# Altium PCB AC_board.PcbDoc (part 3 of 4)
Units mil, origin at the board's own origin, x right, y up, seen from the top; angles counter-clockwise.
Board outline 6299.21 x 4130.86 mil, 4 copper layers (Top Layer, Layer 1, Layer 2, Bottom Layer), stack 31.891 mil thick; 48 components, 40 nets, 187 pads, 6431 vias.
Unrouted connection lines stored in the file: 10.
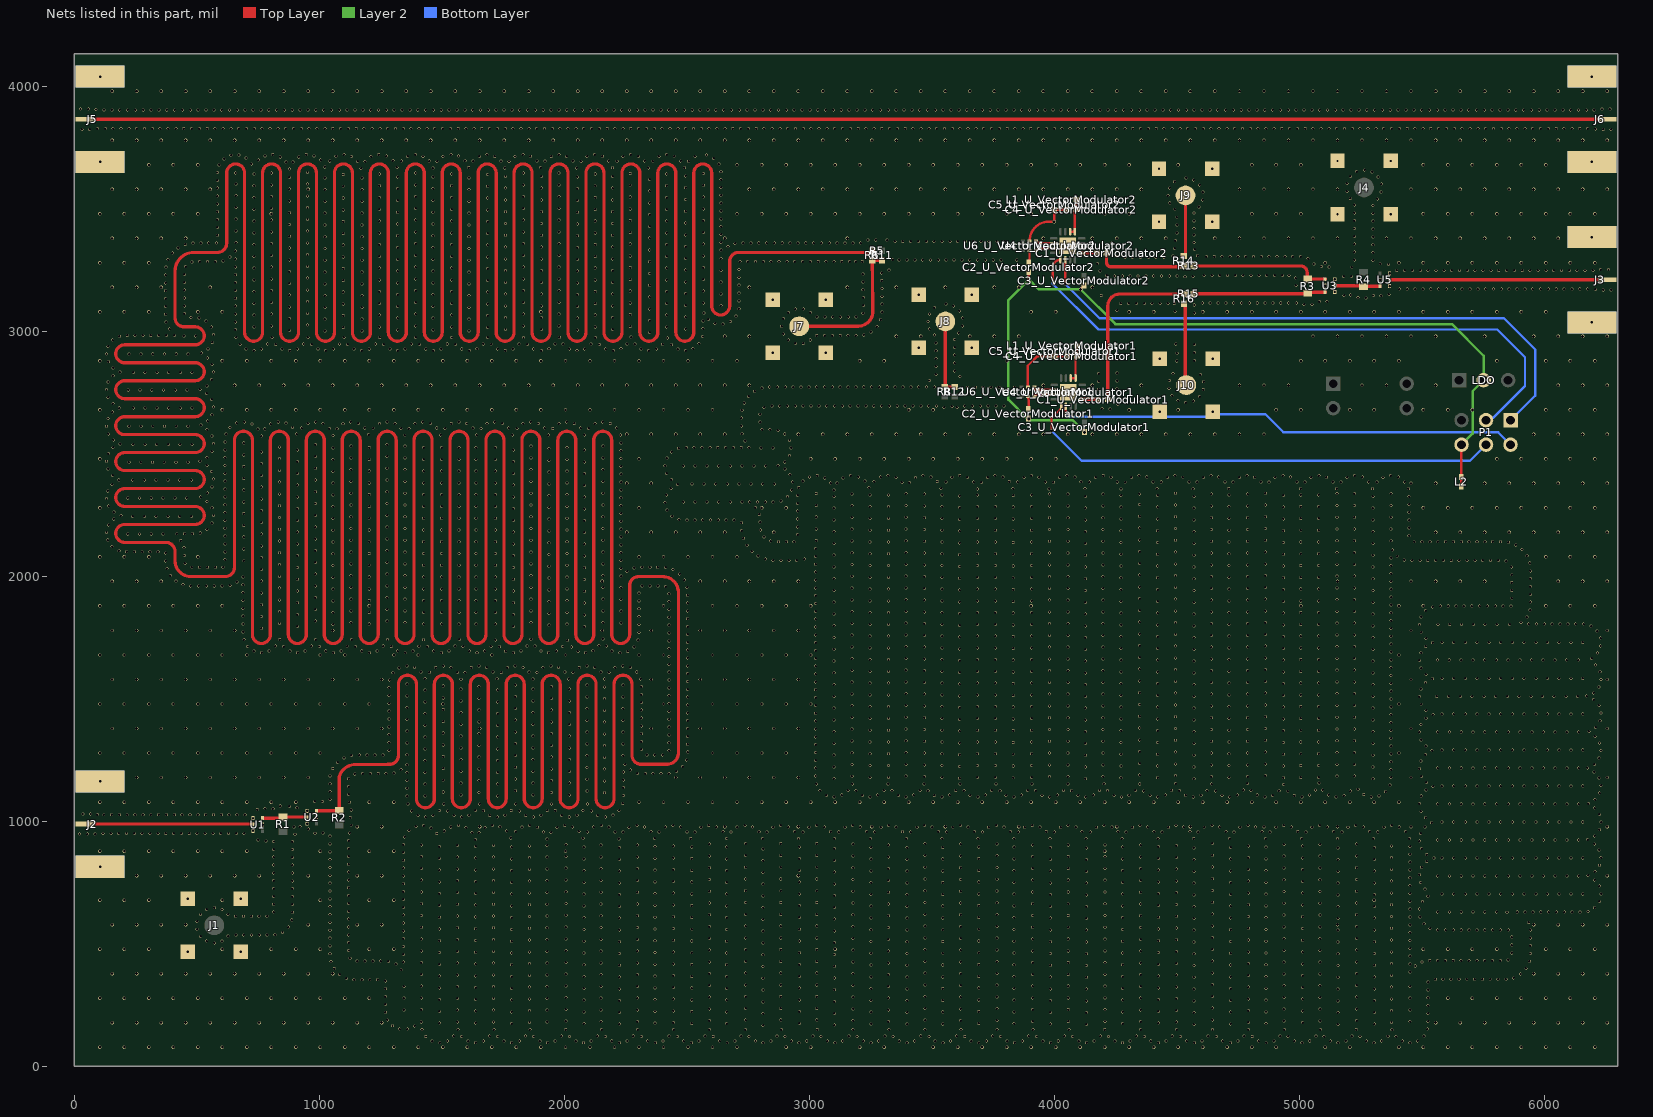
[diagram p5: the nets of this part, all layers, seen from the top]

## Via types
v1: diameter 12/12/12/12 (per signal layer), hole 10, Top Layer to Bottom Layer, 5510 vias
v2: diameter 14/14/14/14 (per signal layer), hole 12, Top Layer to Bottom Layer, 919 vias
v3: diameter 15/15/15/15 (per signal layer), hole 12, Top Layer to Bottom Layer, 2 vias

## Nets (pads, with @x,y where several pads share a name; then routed paths per layer and width w, separated by ;. In a path a pad name is that pad's centre, name@x,y a point inside that pad or via, vN(x,y) a via of type N, cw(c..) or ccw(c..) an arc to the next point about the centre after c; other vN are vias at no path point) (continued)
AGND: (continued)
  other v1: 3556.81,2386.94 3963.23,2386.91 4256.27,2387.15 4549.4,2387.26 4695.87,2387.44 4842.58,2387.32 4989.12,2387.4 5135.78,2387.35 5282.35,2387.39 5428.99,2387.36 3264.42,2388.02 3815.75,2388.04 4109.24,2387.69 4402.59,2387.52 1130.31,2389 1350.31,2389 1864.31,2389 2158.31,2389 3521.86,2388.73 616.25,2390.02 2973.76,2390.6 3226.72,2390.65 182.27,2394.06 239,2395.31 287,2395.31 335,2395.31 383,2395.31 431,2395.31 479,2395.31 984.31,2395 1277.31,2395 2436.94,2396.12 569.01,2398.49 692.26,2401.57 3062.96,2403.64 3137.51,2403.6 3352.95,2405.33 3433.12,2404.96 3727.21,2405.32 4020.83,2405.49 3582.45,2406.09 3644.94,2405.84 3875.11,2405.85 3937.6,2406.07 4083.32,2406.44 4168.05,2405.74 4230.54,2406.19 4314.24,2405.57 4376.73,2406.36 4461.14,2405.69 4523.63,2406.24 4607.55,2405.6 4670.04,2406.33 4754.3,2405.66 4816.79,2406.27 4900.81,2405.62 4963.3,2406.31 5047.49,2405.65 5109.98,2406.28 5194.05,2405.63 5256.54,2406.3 5340.7,2405.64 5403.19,2406.29 3290.47,2406.6 3495.58,2406.98 3789.69,2406.61 3000.62,2408 3199.84,2408.02 3032.27,2412.71 3168.19,2412.7 3321.85,2412.87 3464.12,2412.87 3613.72,2412.87 3758.31,2412.87 3906.33,2412.87 4051.97,2412.87 4199.25,2412.87 4345.39,2412.87 4492.33,2412.87 4638.71,2412.87 4785.48,2412.87 4931.98,2412.87 5078.67,2412.87 5225.22,2412.87 5371.87,2412.87 157.41,2414.21 764,2414 2921.99,2416.59 2231.75,2418.62 2082.31,2421 616.25,2422.02 911.31,2422 1792.31,2422 2417.95,2421.87 1938.31,2427 561.5,2429.59 1057.31,2430 1204.31,2431 1426.31,2431 1499.31,2431 1570.31,2431 1640.31,2431 1719.31,2431 2011.31,2431 838.31,2434 1130.31,2437 1350.31,2437 1864.31,2437 2158.31,2437 138.69,2440.15 2900.36,2440.17 984.31,2443 1277.31,2443 692.26,2449.57 2231.75,2450.62 2485.99,2452.48 2533.99,2452.48 2581.99,2452.48 2629.99,2452.48 2677.99,2452.48 2725.99,2452.48 2773.99,2452.48 2821.99,2452.48 2411.31,2453.17 616.25,2454.02 2871.45,2453.89 541.57,2454.63 764,2462 224,2467.31 272,2467.31 320,2467.31 368,2467.31 416,2467.31 464,2467.31 2082.31,2469 2899.68,2468.96 911.31,2470 1792.31,2470 132.29,2471.51 514.41,2471.55 1938.31,2475 1057.31,2478 1204.31,2479 1426.31,2479 1499.31,2479 1570.31,2479 1640.31,2479 1719.31,2479 2011.31,2479 838.31,2482 2231.75,2482.62 2418.47,2484.36 1130.31,2485 1350.31,2485 1864.31,2485 2158.31,2485 616.25,2486.02 542.66,2486.57 984.31,2491 1277.31,2491 2918.99,2494.48 692.26,2497.57 139.7,2502.64 764,2510 2438.04,2509.69 562.03,2512.04 2231.75,2514.62 2082.31,2517 616.25,2518.02 911.31,2518 1792.31,2518 1938.31,2523 2466.38,2524.54 1057.31,2526 2803.24,2525.79 2851.24,2525.79 2925.92,2525.72 1204.31,2527 1426.31,2527 1499.31,2527 1570.31,2527 1640.31,2527 1719.31,2527 2011.31,2527 2498.27,2527.19 2530.27,2527.19 2562.27,2527.19 2594.27,2527.19 2626.27,2527.19 2658.27,2527.19 2690.27,2527.19 2722.27,2527.19 2754.27,2527.19 159.52,2527.76 838.31,2530 1130.31,2533 1350.31,2533 1864.31,2533 2158.31,2533 984.31,2539 1277.31,2539 241,2540.31 289,2540.31 337,2540.31 385,2540.31 433,2540.31 481,2540.31 187.97,2542.4 569.01,2543.27 692.26,2545.57 2231.75,2546.62 616.25,2550.02 2737.79,2554.61 2919.04,2556.97 160.35,2558.56 763.9,2573.72 562.19,2574.54 1056.38,2576.52 1349.31,2577.6 1642.39,2578.11 1935.54,2578.36 2228.73,2578.47 1495.46,2579.28 1788.78,2578.92 2082.05,2578.74 1202.04,2580.06 620.3,2581.76 908.1,2582.03 140.11,2583.34 2899.78,2582.53 2724.46,2583.71 2871.58,2597.65 542.99,2600.14 2807.71,2600.49 2839.71,2600.49 778.06,2602.42 750.26,2602.67 1072.58,2604.11 1041.72,2604.96 1366.27,2604.73 1659.71,2605.01 1806.66,2605.46 1953.04,2605.15 2099.81,2605.36 1220.69,2606.07 1334.26,2605.84 1513.59,2605.65 1627.16,2606.25 1920.23,2606.45 928.16,2606.96 1479.83,2607.2 1773.27,2606.91 2066.6,2606.77 2213.38,2606.55 1186.06,2607.79 636.96,2609.08 891.34,2609.29 132.29,2614.37 225,2614.31 273,2614.31 321,2614.31 369,2614.31 417,2614.31 465,2614.31 2722.95,2615.67 517.04,2618.86 725.95,2623.48 802.29,2623.33 1097.37,2624.34 1016.57,2624.75 1246.27,2625.29 1308.76,2625.18 1391.32,2624.64 1539.01,2625.09 1601.51,2625.38 1684.88,2624.78 1832.01,2624.99 1894.5,2625.47 1978.26,2624.85 2125.12,2624.95 954.09,2625.72 1159.84,2626.14 1453.81,2625.83 1747.36,2625.69 2040.75,2625.62 2187.61,2625.52 663.58,2626.84 864.65,2626.95 2799.05,2631.3 695.14,2632.12 833.07,2632.08 985.44,2632.14 1128.41,2632.14 1277.53,2632.14 1422.43,2632.14 1570.23,2632.14 1716.02,2632.14 1863.2,2632.14 2009.42,2632.14 2156.3,2632.14 544.74,2634.89 138.27,2645.81 2722.95,2647.67 563.05,2661.13 2799.46,2663.29 156.6,2672.04 4429.73,2673.73 4646.27,2673.73 2724.46,2679.64 4227,2684 4194,2686 184.32,2688.03 242,2689.31 290,2689.31 338,2689.31 386,2689.31 434,2689.31 482,2689.31 2815.53,2690.97 3550.14,2691.25 3602.06,2691.25 569.01,2692.57 3581.86,2695.45 3633.49,2697.26 3665.49,2697.26 3697.49,2697.26 3729.49,2697.26 3761.49,2697.26 3793.49,2697.26 2846.81,2697.74 2878.81,2697.76 2910.81,2697.76 2942.81,2697.76 2974.81,2697.76 3006.81,2697.76 3038.81,2697.76 3070.81,2697.76 3102.81,2697.76 3134.81,2697.76 3166.81,2697.76 3198.81,2697.76 3230.81,2697.76 3262.81,2697.76 3294.81,2697.76 3326.81,2697.76 3358.81,2697.76 3390.81,2697.76 3422.81,2697.76 3454.81,2697.76 3486.81,2697.76 3518.81,2697.76 4259.84,2703.61 158.34,2706.72 2734.57,2710 4535.36,2710.3 4566.77,2716.39 4504.45,2718.58 561.17,2723.6 139.13,2732.31 4592.52,2735.4 4261.26,2735.58 2752.47,2736.52 4480.29,2739.56 540.9,2748.36 2776.97,2757.1 221,2763 269,2763 317,2763 365,2763 413,2763 461,2763 132.29,2763.57 513.25,2764.46 4607.34,2763.76 4179.95,2765.33 4256.05,2767.15 4467.49,2768.89 2806.34,2769.83 3645.36,2773.37 3677.36,2773.37 3709.36,2773.37 3741.36,2773.37 3773.36,2773.37 3837.36,2773.37 2838.02,2774.31 2870.02,2773.86 2902.02,2773.86 2934.02,2773.86 2966.02,2773.86 2998.02,2773.86 3030.02,2773.86 3062.02,2773.86 3094.02,2773.86 3126.02,2773.86 3158.02,2773.86 3190.02,2773.86 3222.02,2773.86 3254.02,2773.86 3286.02,2773.86 3318.02,2773.86 3350.02,2773.86 3382.02,2773.86 3414.02,2773.86 3446.02,2773.86 3478.02,2773.86 3510.02,2773.86 541.72,2779.07 139.26,2794.8 4608.43,2795.74 4179.95,2797.33 4256.05,2799.15 3490,2801 4468.82,2800.86 561.57,2804.16 3615.11,2817.17 158.61,2820.29 4595.33,2824.93 3516.69,2826.27 4179.95,2829.33 4483.87,2829.1 4256.05,2831.15 242,2834.31 290,2834.31 338,2834.31 386,2834.31 434,2834.31 482,2834.31 186.86,2835.32 569.01,2835.29 3592.79,2840.1 159.71,2852.27 3516.69,2858.27 562.65,2866.65 3592.79,2872.1 139.79,2877.32 4499,2881 4571,2882 4180,2886 4257,2889 3516.69,2890.27 4429.73,2890.27 4646.27,2890.27 543.96,2892.62 3592.79,2904.1 132.29,2908.42 225,2908.31 273,2908.31 321,2908.31 369,2908.31 417,2908.31 465,2908.31 4500,2912 519.2,2912.9 2850.73,2913.73 3067.27,2913.73 4571,2915 4180,2919 4256,2921 3516.69,2922.27 733.39,2923.04 879.93,2923.04 1026.64,2923.04 1173.11,2923.04 1319.91,2923.04 1466.25,2923.04 1613.26,2923.04 1759.29,2923.04 1906.73,2923.04 2052.14,2923.04 2200.5,2923.04 2344.59,2923.04 2494.97,2923.04 1875.38,2929.43 2169.11,2929.22 2463.48,2928.74 546.4,2929.76 702.07,2929.61 764.56,2930.29 848.62,2929.63 911.11,2930.26 995.31,2929.6 1057.8,2930.3 1141.8,2929.65 1204.29,2930.25 1288.59,2929.58 1351.08,2930.32 1434.94,2929.68 1497.43,2930.21 1581.92,2929.53 1644.41,2930.36 1728,2929.75 1790.49,2930.15 1937.86,2930.46 2020.88,2929.89 2083.38,2930.01 2313.4,2930.18 2375.89,2929.71 2231.58,2930.67 2525.92,2931.18 3446.73,2933.73 3663.27,2933.73 3592.79,2936.1 138.59,2939.8 2437.09,2946.84 969.49,2948.5 1262.75,2948.45 1556.04,2948.35 1849.42,2948.15 2142.99,2947.72 4180,2948 4571,2948 676.25,2948.52 822.83,2948.57 1116.02,2948.61 1409.19,2948.67 1702.3,2948.81 1995.3,2949.11 2108.87,2949.35 2401.62,2948.74 789.82,2949.93 936.39,2949.88 1083.06,2949.95 1229.59,2949.85 1376.31,2949.99 1522.76,2949.78 1669.61,2950.09 1815.87,2949.64 1962.98,2950.29 2288.05,2949.72 4256,2950 4495,2950 2256.52,2950.71 2550.49,2951.68 2943.07,2952.04 2975.07,2952.07 3516.69,2954.27 563.95,2956.52 157.21,2965.82 2914.29,2966.03 3003.83,2966.12 3592.79,2968.1 2420.77,2974.37 1247.32,2976.49 1540.57,2976.36 1833.86,2976.11 2127.22,2975.56 660.85,2976.57 807.45,2976.63 954.08,2976.54 1100.66,2976.68 1393.85,2976.76 1687.03,2976.93 1980.15,2977.29 2273.17,2978.05 2564.5,2980.45 185.12,2981.47 448,2983.31 496,2983.31 3030.17,2984.28 3062.17,2984.28 3094.17,2984.28 3126.17,2984.28 3158.17,2984.28 3190.17,2984.28 216.96,2984.71 248.96,2984.71 280.96,2984.71 312.96,2984.71 344.96,2984.71 376.96,2984.71 408.96,2984.71 3510.71,2985.71 3222.05,2987.11 568.91,2988.13 2894.31,2991.02 3609.51,2995.39 2348.41,2997.47 3251.49,2999.65 1023.41,3003.47 1174.41,3003.47 1611.41,3003.47 878.41,3005.47 1320.41,3007.47 1465.41,3007.47 2053.41,3007.47 657.8,3008.43 1760.41,3009.47 1906.41,3009.47 2197.41,3009.47 389.97,3010.47 2495.41,3011.47 3490.51,3010.53 2566.52,3012.38 1098.41,3017.47 1687.41,3017.47 560.03,3018.87 734.41,3019.47 1245.41,3019.47 1540.41,3019.47 2126.41,3019.47 2417.41,3019.47 2269.41,3021.47 3275.24,3021.09 2887.05,3022.19 805.41,3023.47 1393.41,3023.47 1833.41,3023.47 1978.41,3023.47 3624.34,3023.75 952.41,3026.47 2647.52,3031.1 2615.64,3033.91 6193.21,3038 375.91,3039.21 657.8,3040.43 2677.75,3041.59 3483.3,3041.71 539.03,3043.01 2566.52,3044.38 2348.41,3045.47 3291.18,3048.84 2587.96,3049.97 1023.41,3051.47 1174.41,3051.47 1611.41,3051.47 878.41,3053.47 2894.45,3053.32 1320.41,3055.47 1465.41,3055.47 2053.41,3055.47 509.98,3056.43 3625.43,3055.73 1760.41,3057.47 1906.41,3057.47 2197.41,3057.47 478.02,3058.02 2495.41,3059.47 3031.05,3060.38 3063.05,3060.38 3095.05,3060.38 3127.05,3060.38 3159.05,3060.38 3191.05,3060.38 2700.75,3063.84 1098.41,3065.47 1687.41,3065.47 734.41,3067.47 1245.41,3067.47 1540.41,3067.47 2126.41,3067.47 2417.41,3067.47 2269.41,3069.47 373.95,3071.15 805.41,3071.47 1393.41,3071.47 1833.41,3071.47 1978.41,3071.47 657.8,3072.43 3490.29,3072.93 450.05,3073.57 952.41,3074.47 3219.38,3075.25 2569.68,3076.23 4571,3077 2914.58,3078.19 3004.11,3077.66 3297.28,3080.26 4491.57,3082.7 3612.34,3084.93 4256.05,3087.15 2943.42,3092.06 2975.42,3091.83 2348.41,3093.47 2712.15,3093.74 3510.25,3097.94 1023.41,3099.47 1174.41,3099.47 1611.41,3099.47 878.41,3101.47 373.95,3103.15 1320.41,3103.47 1465.41,3103.47 2053.41,3103.47 657.8,3104.43 1760.41,3105.47 1906.41,3105.47 2197.41,3105.47 450.05,3105.57 2639.41,3106.47 3588.02,3105.73 2495.41,3107.47 3220.54,3107.23 4570.44,3109.05 5019,3111.43 5051,3111.46 3296.83,3112.25 1098.41,3113.47 1687.41,3113.47 3557.03,3113.7 734.41,3115.47 1245.41,3115.47 1540.41,3115.47 2126.41,3115.47 2417.41,3115.47 4489,3115 4270.64,3115.63 4302.64,3115.63 4334.64,3115.63 4366.64,3115.63 4398.64,3115.63 4430.64,3115.63 4462.64,3115.63 2269.41,3117.47 2567.41,3117.47 4603.52,3117.19 4635.52,3117.19 4667.52,3117.19 4699.52,3117.19 4731.52,3117.19 4763.52,3117.19 4795.52,3117.19 4827.52,3117.19 4859.52,3117.19 4891.52,3117.19 4923.52,3117.19 4955.52,3117.19 4987.52,3117.19 805.41,3119.47 1393.41,3119.47 1833.41,3119.47 1978.41,3119.47 952.41,3122.47 5081.01,3122.55 5113.01,3122.94 2713.13,3125.72 2850.73,3130.27 3067.27,3130.27 373.95,3135.15 657.8,3136.43 450.05,3137.57 5270.53,3138.43 3220.23,3139.23 5238.54,3139.08 2348.41,3141.47 3296.5,3144.25 1023.41,3147.47 1174.41,3147.47 1611.41,3147.47 5333.14,3146.68 4191.08,3147.67 5182,3148 5301.15,3147.72 878.41,3149.47 3446.73,3150.27 3663.27,3150.27 5208.41,3149.85 1320.41,3151.47 1465.41,3151.47 2053.41,3151.47 5365,3152 1760.41,3153.47 1906.41,3153.47 2197.41,3153.47 2639.41,3154.47 2495.41,3155.47 2713.13,3157.72 1098.41,3161.47 1687.41,3161.47 5143.49,3162.02 734.41,3163.47 1245.41,3163.47 1540.41,3163.47 2126.41,3163.47 2417.41,3163.47 2269.41,3165.47 2567.41,3165.47 373.95,3167.15 805.41,3167.47 1393.41,3167.47 1833.41,3167.47 1978.41,3167.47 657.8,3168.43 450.05,3169.57 952.41,3170.47 3219.76,3171.23 6239.38,3170.73 6271.38,3170.73 6207.45,3172.9 5407.47,3173.95 5439.47,3173.95 5471.47,3173.95 5503.47,3173.95 5535.47,3173.95 5567.47,3173.95 5599.47,3173.95 5631.47,3173.95 5663.47,3173.95 5695.47,3173.95 5727.47,3173.95 5759.47,3173.95 5791.47,3173.95 5823.47,3173.95 5855.47,3173.95 5887.47,3173.95 5919.47,3173.95 5951.47,3173.95 5983.47,3173.95 6015.47,3173.95 6047.47,3173.95 6079.47,3173.95 6111.47,3173.95 6143.47,3173.95 6175.47,3173.95 3296.04,3176.25 5367.49,3186.02 5104.51,3188 2348.41,3189.47 4985,3189 2713.13,3189.72 1023.41,3195.47 1174.41,3195.47 1611.41,3195.47 878.41,3197.47 373.95,3199.15 1320.41,3199.47 1465.41,3199.47 2053.41,3199.47 657.8,3200.43 1760.41,3201.47 1906.41,3201.47 2197.41,3201.47 450.05,3201.57 2639.41,3202.47 2495.41,3203.47 3219.3,3203.22 3295.57,3208.24 1098.41,3209.47 1687.41,3209.47 734.41,3211.47 1245.41,3211.47 1540.41,3211.47 2126.41,3211.47 2417.41,3211.47 5328.51,3212 2269.41,3213.47 2567.41,3213.47 5143.49,3213.98 805.41,3215.47 1393.41,3215.47 1833.41,3215.47 1978.41,3215.47 952.41,3218.47 4984,3219 2713.13,3221.72 4532.78,3224.11 4565,3226 5179.81,3225.95 5211.81,3225.95 4244.94,3227.26 4276.94,3227.26 4308.94,3227.26 4340.94,3227.26 4372.94,3227.26 4404.94,3227.26 4436.94,3227.26 4468.94,3227.26 4500.94,3227.26 4213.04,3229.84 4610.11,3229.93 4642.11,3229.93 4674.11,3229.93 4706.11,3229.93 4738.11,3229.93 4770.11,3229.93 4802.11,3229.93 4834.11,3229.93 4866.11,3229.93 4898.11,3229.93 4930.11,3229.93 4957,3230 373.95,3231.15 657.8,3232.43 450.05,3233.57 3218.83,3235.22 2348.41,3237.47 5367.49,3237.98 3295.11,3240.24 1023.41,3243.47 1174.41,3243.47 1611.41,3243.47 878.41,3245.47 1320.41,3247.47 1465.41,3247.47 2053.41,3247.47 4186.71,3248.02 1760.41,3249.47 1906.41,3249.47 2197.41,3249.47 2639.41,3250.47 5396.84,3250.05 5428.84,3250.05 5460.84,3250.05 5492.84,3250.05 5524.84,3250.05 5556.84,3250.05 5588.84,3250.05 5620.84,3250.05 5652.84,3250.05 5684.84,3250.05 5716.84,3250.05 5748.84,3250.05 5780.84,3250.05 5812.84,3250.05 5844.84,3250.05 5876.84,3250.05 5908.84,3250.05 5940.84,3250.05 5972.84,3250.05 6004.84,3250.05 6036.84,3250.05 6068.84,3250.05 6100.84,3250.05 6132.84,3250.05 6164.84,3250.05 6196.84,3250.05 2495.41,3251.47 3325.03,3251.59 6228.68,3253.27 6260.68,3253.27 2713.13,3253.72 1098.41,3257.47 1687.41,3257.47 734.41,3259.47 1245.41,3259.47 1540.41,3259.47 2126.41,3259.47 2417.41,3259.47 2269.41,3261.47 2567.41,3261.47 375.11,3263.13 805.41,3263.47 1393.41,3263.47 1833.41,3263.47 1978.41,3263.47 5213.13,3263.06 657.8,3264.43 5121,3264 455.02,3265.18 952.41,3266.47 5089,3266 5363,3275 5058.6,3276.3 5329.29,3277.33 4175.1,3277.84 480.55,3284.47 2348.41,3285.47 512.53,3285.57 544.53,3285.57 576.53,3285.57 2716.27,3285.57 2748.27,3285.57 2780.27,3285.57 2812.27,3285.57 2844.27,3285.57 2876.27,3285.57 2908.27,3285.57 2940.27,3285.57 2972.27,3285.57 3004.27,3285.57 3036.27,3285.57 3068.27,3285.57 3100.27,3285.57 3132.27,3285.57 3164.27,3285.57 3189,3286 3216,3286 608.35,3288.98 1023.41,3291.47 1174.41,3291.47 1611.41,3291.47 5300.31,3290.91 878.41,3293.47 3366.34,3292.81 3398.34,3292.81 3430.34,3292.81 3462.34,3292.81 3494.34,3292.81 3526.34,3292.81 3558.34,3292.81 3590.34,3292.81 3622.34,3292.81 3654.34,3292.81 3686.34,3292.81 3718.34,3292.81 3750.34,3292.81 3782.34,3292.81 3846.34,3292.81 5224.21,3293.08 383.83,3293.92 3340,3294 1320.41,3295.47 1465.41,3295.47 2053.41,3295.47 657.8,3296.43 1760.41,3297.47 1906.41,3297.47 2197.41,3297.47 2639.41,3298.47 5035.1,3298.02 2495.41,3299.47 4287.29,3303.36 4319.29,3303.36 4351.29,3303.36 4383.29,3303.36 4415.29,3303.36 4447.29,3303.36 636.12,3304.89 1098.41,3305.47 1687.41,3305.47 4255.4,3306.03 4620.16,3306.03 4652.16,3306.03 4684.16,3306.03 4716.16,3306.03 4748.16,3306.03 4780.16,3306.03 4812.16,3306.03 4844.16,3306.03 4876.16,3306.03 4908.16,3306.03 4940.16,3306.03 4972.16,3306.03 5004.16,3306.17 734.41,3307.47 1245.41,3307.47 1540.41,3307.47 2126.41,3307.47 2417.41,3307.47 4483.94,3308.5 2269.41,3309.47 2567.41,3309.47 4584,3310 805.41,3311.47 1393.41,3311.47 1833.41,3311.47 1978.41,3311.47 952.41,3314.47 401.07,3320.88 5300.31,3322.91 5224.21,3325.08 657.8,3328.43 2348.41,3333.47 2639.83,3332.72 4572,3336 4255.13,3338.03 1023.41,3339.47 1174.41,3339.47 1611.41,3339.47 4490.12,3339.89 878.41,3341.47 424.83,3342.32 1320.41,3343.47 1465.41,3343.47 2053.41,3343.47 1760.41,3345.47 1906.41,3345.47 2197.41,3345.47 2495.41,3347.47 2668.19,3347.55 1098.41,3353.47 1687.41,3353.47 734.41,3355.47 1245.41,3355.47 1540.41,3355.47 2126.41,3355.47 2417.41,3355.47 5300.31,3354.91 453.71,3356.1 2269.41,3357.47 2567.41,3357.47 5224.21,3357.08 805.41,3359.47 1393.41,3359.47 1833.41,3359.47 1978.41,3359.47 2697.53,3360.31 4232.9,3361.04 485.2,3361.76 517.2,3361.67 549.2,3361.67 581.2,3361.67 952.41,3362.47 2729.5,3361.67 2761.5,3361.67 2793.5,3361.67 2825.5,3361.67 2857.5,3361.67 2889.5,3361.67 2921.5,3361.67 2953.5,3361.67 2985.5,3361.67 3017.5,3361.67 3049.5,3361.67 3081.5,3361.67 3113.5,3361.67 3145.5,3361.67 3177.5,3361.67 3209.5,3361.67 4196.88,3361.54 660.41,3363.47 4569,3364 2639.83,3364.72 3349.16,3368.91 3381.16,3368.91 3413.16,3368.91 3445.16,3368.91 3477.16,3368.91 3509.16,3368.91 3541.16,3368.91 3573.16,3368.91 3605.16,3368.91 3637.16,3368.91 3669.16,3368.91 3701.16,3368.91 3733.16,3368.91 3765.16,3368.91 3797,3368.91 4493.45,3371.72 3238.92,3374.27 3317.54,3373.86 3270.91,3374.76 2348.41,3381.47 6193.21,3386 1023.41,3387.47 1174.41,3387.47 1611.41,3387.47 5300.31,3386.91 878.41,3389.47 5224.21,3389.08 1320.41,3391.47 1465.41,3391.47 2053.41,3391.47 1760.41,3393.47 1906.41,3393.47 2197.41,3393.47 584.49,3393.5 2495.41,3395.47 4569,3395 2639.83,3396.72 1098.41,3401.47 1687.41,3401.47 734.41,3403.47 1245.41,3403.47 1540.41,3403.47 2126.41,3403.47 2417.41,3403.47 4500,3403 2269.41,3405.47 2567.41,3405.47 805.41,3407.47 1393.41,3407.47 1833.41,3407.47 1978.41,3407.47 952.41,3410.47 660.41,3411.47 5300.31,3418.91 4569.55,3420.4 5224.21,3421.08 584.49,3425.5 2348.41,3429.47 2639.83,3428.72 1023.41,3435.47 1174.41,3435.47 1611.41,3435.47 4501,3436 878.41,3437.47 1320.41,3439.47 1465.41,3439.47 2053.41,3439.47 1760.41,3441.47 1906.41,3441.47 2197.41,3441.47 2495.41,3443.47 4426.73,3447.75 4643.27,3447.75 1098.41,3449.47 1687.41,3449.47 734.41,3451.47 1245.41,3451.47 1540.41,3451.47 2126.41,3451.47 2417.41,3451.47 5300.31,3450.91 4569.55,3452.4 2269.41,3453.47 2567.41,3453.47 5224.21,3453.08 805.41,3455.47 1393.41,3455.47 1833.41,3455.47 1978.41,3455.47 584.49,3457.5 952.41,3458.47 660.41,3459.47 2639.83,3460.72 4499,3467 2348.41,3477.47 5155.04,3480.04 5371.57,3480.04 1023.41,3483.47 1174.41,3483.47 1611.41,3483.47 5300.31,3482.91 4569.55,3484.4 878.41,3485.47 5224.21,3485.08 1320.41,3487.47 1465.41,3487.47 2053.41,3487.47 1760.41,3489.47 1906.41,3489.47 2197.41,3489.47 584.49,3489.5 2495.41,3491.47 2639.83,3492.72 1098.41,3497.47 1687.41,3497.47 734.41,3499.47 1245.41,3499.47 1540.41,3499.47 2126.41,3499.47 2417.41,3499.47 4490.86,3499.61 2269.41,3501.47 2567.41,3501.47 805.41,3503.47 1393.41,3503.47 1833.41,3503.47 1978.41,3503.47 952.41,3506.47 660.41,3507.47 4589.51,3509.41 5300.31,3514.91 5224.21,3517.08 584.49,3521.5 4470.59,3524.37 2348.41,3525.47 2639.83,3524.72 1023.41,3531.47 1174.41,3531.47 1611.41,3531.47 878.41,3533.47 1320.41,3535.47 1465.41,3535.47 2053.41,3535.47 1760.41,3537.47 1906.41,3537.47 2197.41,3537.47 4604.34,3537.77 2495.41,3539.47 5317.82,3541.7 5206.99,3544.05 1098.41,3545.47 1687.41,3545.47 734.41,3547.47 1245.41,3547.47 1540.41,3547.47 2126.41,3547.47 2417.41,3547.47 2269.41,3549.47 2567.41,3549.47 805.41,3551.47 1393.41,3551.47 1833.41,3551.47 1978.41,3551.47 584.49,3553.5 952.41,3554.47 660.41,3555.47 4463.3,3555.53 2639.83,3556.72 4605.43,3569.75 5332.65,3570.05 2348.41,3573.47 5193.19,3572.92 1023.41,3579.47 1174.41,3579.47 1611.41,3579.47 878.41,3581.47 1320.41,3583.47 1465.41,3583.47 2053.41,3583.47 1760.41,3585.47 1906.41,3585.47 2197.41,3585.47 584.49,3585.5 2495.41,3587.47 4470.21,3586.77 2639.83,3588.72 1098.41,3593.47 1687.41,3593.47 734.41,3595.47 1245.41,3595.47 1540.41,3595.47 2126.41,3595.47 2417.41,3595.47 2269.41,3597.47 2567.41,3597.47 805.41,3599.47 1393.41,3599.47 1833.41,3599.47 1978.41,3599.47 4592.34,3598.95 952.41,3602.47 5333.74,3602.03 660.41,3603.47 5193.53,3604.92 4490.1,3611.85 584.49,3617.5 4568.02,3619.75 2348.41,3621.47 2639.83,3620.72 1023.41,3627.47 1174.41,3627.47 1611.41,3627.47 4537.03,3627.72 878.41,3629.47 1320.41,3631.47 1465.41,3631.47 2053.41,3631.47 5320.64,3631.23 1760.41,3633.47 1906.41,3633.47 2197.41,3633.47 5207.77,3633.58 2495.41,3635.47 1098.41,3641.47 1687.41,3641.47 734.41,3643.47 1245.41,3643.47 1540.41,3643.47 2126.41,3643.47 2417.41,3643.47 2269.41,3645.47 2567.41,3645.47 805.41,3647.47 1393.41,3647.47 1833.41,3647.47 1978.41,3647.47 659.19,3647.64 584.49,3649.5 952.41,3650.47 5296.33,3652.03 2639.67,3652.72 5232.99,3653.27 5265.34,3660.01 878.93,3663.27 4426.73,3664.29 4643.27,3664.29 1171.29,3666.48 1464.19,3667.68 1757.26,3668.24 1903.63,3669.14 2050.4,3668.52 2196.9,3668.94 2343.59,3668.65 2490.14,3668.85 1316.85,3670.41 1610.3,3669.54 1022.77,3672.66 592.12,3680.58 2630.69,3683.44 723.8,3685.09 865.52,3692.32 892.61,3692.2 106,3692.99 6193.21,3692.99 1187.34,3694.17 1156.71,3694.97 1481.09,3694.86 1774.55,3695.17 2067.88,3695.32 2361.16,3695.39 1335.61,3696.33 1449.18,3695.94 1628.48,3695.88 1742.05,3696.4 1921.53,3695.66 2214.67,3695.55 2507.85,3695.5 1043.15,3697.33 1594.64,3697.45 1888.11,3697.12 2035.1,3696.62 2181.44,3696.96 2328.24,3696.72 2474.72,3696.89 5155.04,3696.57 5371.57,3696.57 1300.8,3698.09 752.27,3699.72 1005.84,3699.82 612.15,3705.54 2609.6,3707.51 702.17,3708.67 841.38,3713.33 916.7,3713.26 1212.08,3714.46 1131.63,3714.85 1423.71,3715.32 1506.11,3714.8 1653.91,3715.29 1799.7,3714.95 1946.88,3715.19 2093.1,3715.02 2239.98,3715.14 2386.4,3715.06 2533.14,3715.11 1069.15,3715.99 1274.54,3716.38 1361.22,3715.51 1568.59,3716.04 1716.41,3715.54 1862.19,3715.89 2009.37,3715.65 2155.58,3715.81 2302.47,3715.7 2448.89,3715.78 779.02,3717.27 979.05,3717.32 640.69,3720 672.67,3721.08 2580.51,3720.83 810.64,3722.22 947.43,3722.2 1100.52,3722.32 1243.1,3722.32 1392.49,3722.32 1537.22,3722.32 1685.13,3722.32 1830.84,3722.32 1978.08,3722.32 2124.25,3722.32 2271.16,3722.32 2417.57,3722.32 31.63,3825.72 63.63,3825.72 6239.38,3825.72 6271.38,3825.72 6207.45,3827.89 95.47,3828.94 127.47,3828.94 159.47,3828.94 191.47,3828.94 223.47,3828.94 255.47,3828.94 287.47,3828.94 319.47,3828.94 351.47,3828.94 383.47,3828.94 415.47,3828.94 447.47,3828.94 479.47,3828.94 511.47,3828.94 543.47,3828.94 575.47,3828.94 607.47,3828.94 639.47,3828.94 671.47,3828.94 703.47,3828.94 735.47,3828.94 767.47,3828.94 799.47,3828.94 831.47,3828.94 863.47,3828.94 895.47,3828.94 927.47,3828.94 959.47,3828.94 991.47,3828.94 1023.47,3828.94 1055.47,3828.94 1087.47,3828.94 1119.47,3828.94 1151.47,3828.94 1183.47,3828.94 1215.47,3828.94 1247.47,3828.94 1279.47,3828.94 1311.47,3828.94 1343.47,3828.94 1375.47,3828.94 1407.47,3828.94 1439.47,3828.94 1471.47,3828.94 1503.47,3828.94 1535.47,3828.94 1567.47,3828.94 1599.47,3828.94 1631.47,3828.94 1663.47,3828.94 1695.47,3828.94 1727.47,3828.94 1759.47,3828.94 1791.47,3828.94 1823.47,3828.94 1855.47,3828.94 1887.47,3828.94 1919.47,3828.94 1951.47,3828.94 1983.47,3828.94 2015.47,3828.94 2047.47,3828.94 2079.47,3828.94 2111.47,3828.94 2143.47,3828.94 2175.47,3828.94 2207.47,3828.94 2239.47,3828.94 2271.47,3828.94 2303.47,3828.94 2335.47,3828.94 2367.47,3828.94 2399.47,3828.94 2431.47,3828.94 2463.47,3828.94 2495.47,3828.94 2527.47,3828.94 2559.47,3828.94 2591.47,3828.94 2623.47,3828.94 2655.47,3828.94 2687.47,3828.94 2719.47,3828.94 2751.47,3828.94 2783.47,3828.94 2815.47,3828.94 2847.47,3828.94 2879.47,3828.94 2911.47,3828.94 2943.47,3828.94 2975.47,3828.94 3007.47,3828.94 3039.47,3828.94 3071.47,3828.94 3103.47,3828.94 3135.47,3828.94 3167.47,3828.94 3199.47,3828.94 3231.47,3828.94 3263.47,3828.94 3295.47,3828.94 3327.47,3828.94 3359.47,3828.94 3391.47,3828.94 3423.47,3828.94 3455.47,3828.94 3487.47,3828.94 3519.47,3828.94 3551.47,3828.94 3583.47,3828.94 3615.47,3828.94 3647.47,3828.94 3679.47,3828.94 3711.47,3828.94 3743.47,3828.94 3775.47,3828.94 3807.47,3828.94 3839.47,3828.94 3871.47,3828.94 3903.47,3828.94 3935.47,3828.94 3967.47,3828.94 3999.47,3828.94 4031.47,3828.94 4063.47,3828.94 4095.47,3828.94 4127.47,3828.94 4159.47,3828.94 4191.47,3828.94 4223.47,3828.94 4255.47,3828.94 4287.47,3828.94 4319.47,3828.94 4351.47,3828.94 4383.47,3828.94 4415.47,3828.94 4447.47,3828.94 4479.47,3828.94 4511.47,3828.94 4543.47,3828.94 4575.47,3828.94 4607.47,3828.94 4639.47,3828.94 4671.47,3828.94 4703.47,3828.94 4735.47,3828.94 4767.47,3828.94 4799.47,3828.94 4831.47,3828.94 4863.47,3828.94 4895.47,3828.94 4927.47,3828.94 4959.47,3828.94 4991.47,3828.94 5023.47,3828.94 5055.47,3828.94 5087.47,3828.94 5119.47,3828.94 5151.47,3828.94 5183.47,3828.94 5215.47,3828.94 5247.47,3828.94 5279.47,3828.94 5311.47,3828.94 5343.47,3828.94 5375.47,3828.94 5407.47,3828.94 5439.47,3828.94 5471.47,3828.94 5503.47,3828.94 5535.47,3828.94 5567.47,3828.94 5599.47,3828.94 5631.47,3828.94 5663.47,3828.94 5695.47,3828.94 5727.47,3828.94 5759.47,3828.94 5791.47,3828.94 5823.47,3828.94 5855.47,3828.94 5887.47,3828.94 5919.47,3828.94 5951.47,3828.94 5983.47,3828.94 6015.47,3828.94 6047.47,3828.94 6079.47,3828.94 6111.47,3828.94 6143.47,3828.94 6175.47,3828.94 122.24,3905.04 154.24,3905.04 186.24,3905.04 218.24,3905.04 250.24,3905.04 282.24,3905.04 314.24,3905.04 346.24,3905.04 378.24,3905.04 410.24,3905.04 442.24,3905.04 474.24,3905.04 506.24,3905.04 538.24,3905.04 570.24,3905.04 602.24,3905.04 634.24,3905.04 666.24,3905.04 698.24,3905.04 730.24,3905.04 762.24,3905.04 794.24,3905.04 826.24,3905.04 858.24,3905.04 890.24,3905.04 922.24,3905.04 954.24,3905.04 986.24,3905.04 1018.24,3905.04 1050.24,3905.04 1082.24,3905.04 1114.24,3905.04 1146.24,3905.04 1178.24,3905.04 1210.24,3905.04 1242.24,3905.04 1274.24,3905.04 1306.24,3905.04 1338.24,3905.04 1370.24,3905.04 1402.24,3905.04 1434.24,3905.04 1466.24,3905.04 1498.24,3905.04 1530.24,3905.04 1562.24,3905.04 1594.24,3905.04 1626.24,3905.04 1658.24,3905.04 1690.24,3905.04 1722.24,3905.04 1754.24,3905.04 1786.24,3905.04 1818.24,3905.04 1850.24,3905.04 1882.24,3905.04 1914.24,3905.04 1946.24,3905.04 1978.24,3905.04 2010.24,3905.04 2042.24,3905.04 2074.24,3905.04 2106.24,3905.04 2138.24,3905.04 2170.24,3905.04 2202.24,3905.04 2234.24,3905.04 2266.24,3905.04 2298.24,3905.04 2330.24,3905.04 2362.24,3905.04 2394.24,3905.04 2426.24,3905.04 2458.24,3905.04 2490.24,3905.04 2522.24,3905.04 2554.24,3905.04 2586.24,3905.04 2618.24,3905.04 2650.24,3905.04 2682.24,3905.04 2714.24,3905.04 2746.24,3905.04 2778.24,3905.04 2810.24,3905.04 2842.24,3905.04 2874.24,3905.04 2906.24,3905.04 2938.24,3905.04 2970.24,3905.04 3002.24,3905.04 3034.24,3905.04 3066.24,3905.04 3098.24,3905.04 3130.24,3905.04 3162.24,3905.04 3194.24,3905.04 3226.24,3905.04 3258.24,3905.04 3290.24,3905.04 3322.24,3905.04 3354.24,3905.04 3386.24,3905.04 3418.24,3905.04 3450.24,3905.04 3482.24,3905.04 3514.24,3905.04 3546.24,3905.04 3578.24,3905.04 3610.24,3905.04 3642.24,3905.04 3674.24,3905.04 3706.24,3905.04 3738.24,3905.04 3770.24,3905.04 3802.24,3905.04 3834.24,3905.04 3866.24,3905.04 3898.24,3905.04 3930.24,3905.04 3962.24,3905.04 3994.24,3905.04 4026.24,3905.04 4058.24,3905.04 4090.24,3905.04 4122.24,3905.04 4154.24,3905.04 4186.24,3905.04 4218.24,3905.04 4250.24,3905.04 4282.24,3905.04 4314.24,3905.04 4346.24,3905.04 4378.24,3905.04 4410.24,3905.04 4442.24,3905.04 4474.24,3905.04 4506.24,3905.04 4538.24,3905.04 4570.24,3905.04 4602.24,3905.04 4634.24,3905.04 4666.24,3905.04 4698.24,3905.04 4730.24,3905.04 4762.24,3905.04 4794.24,3905.04 4826.24,3905.04 4858.24,3905.04 4890.24,3905.04 4922.24,3905.04 4954.24,3905.04 4986.24,3905.04 5018.24,3905.04 5050.24,3905.04 5082.24,3905.04 5114.24,3905.04 5146.24,3905.04 5178.24,3905.04 5210.24,3905.04 5242.24,3905.04 5274.24,3905.04 5306.24,3905.04 5338.24,3905.04 5370.24,3905.04 5402.24,3905.04 5434.24,3905.04 5466.24,3905.04 5498.24,3905.04 5530.24,3905.04 5562.24,3905.04 5594.24,3905.04 5626.24,3905.04 5658.24,3905.04 5690.24,3905.04 5722.24,3905.04 5754.24,3905.04 5786.24,3905.04 5818.24,3905.04 5850.24,3905.04 5882.24,3905.04 5914.24,3905.04 5946.24,3905.04 5978.24,3905.04 6010.24,3905.04 6042.24,3905.04 6074.24,3905.04 6106.24,3905.04 6138.24,3905.04 6170.24,3905.04 6202.24,3905.04 90.29,3906.7 26.32,3908.26 58.32,3908.26 6234.08,3908.26 6266.08,3908.26 106,4040.99 6193.21,4040.99
  other v2: 105,81 205,81 305,81 405,81 505,81 605,81 705,81 805,81 905,81 1005,81 1105,81 1205,81 1305,81 1405,81 1505,81 1605,81 1705,81 1805,81 1905,81 2005,81 2105,81 2205,81 2305,81 2405,81 2505,81 2605,81 2705,81 2905,81 3005,81 3205,81 3305,81 3505,81 3605,81 3705,81 3805,81 3905,81 4005,81 4105,81 4205,81 4305,81 4405,81 4505,81 4605,81 4705,81 4805,81 4905,81 5105,81 5205,81 5405,81 5505,81 5605,81 5705,81 5805,81 5905,81 6005,81 6105,81 6205,81 155,181 255,181 355,181 455,181 555,181 655,181 755,181 855,181 955,181 1055,181 1155,181 1255,181 5555,181 5655,181 5755,181 5855,181 5955,181 6055,181 6155,181 6255,181 105,281 205,281 305,281 405,281 505,281 605,281 705,281 805,281 905,281 1005,281 1105,281 1205,281 5605,281 5705,281 5805,281 5905,281 6005,281 6105,281 6205,281 155,381 255,381 355,381 455,381 555,381 655,381 755,381 855,381 955,381 1055,381 5955,381 6055,381 6155,381 6255,381 105,481 205,481 305,481 605,481 805,481 905,481 1005,481 1205,481 1305,481 3105,481 5505,481 5605,481 5705,481 5805,481 6005,481 6105,481 6205,481 155,581 255,581 355,581 455,581 955,581 1155,581 1255,581 5155,581 5955,581 6055,581 6155,581 6255,581 105,681 205,681 305,681 605,681 1005,681 1205,681 1305,681 5305,681 255,781 355,781 455,781 555,781 655,781 755,781 955,781 1155,781 1255,781 2955,781 6255,781 105,881 205,881 305,881 405,881 505,881 605,881 705,881 1005,881 1205,881 1305,881 2005,881 4205,881 1155,981 1255,981 1655,981 2655,981 2955,981 3255,981 3555,981 3855,981 4255,981 4555,981 4855,981 5155,981 5455,981 6255,981 105,1081 205,1081 305,1081 405,1081 505,1081 605,1081 705,1081 805,1081 905,1081 1205,1081 1305,1081 2305,1081 2405,1081 2505,1081 2605,1081 2705,1081 2805,1081 2905,1081 3005,1081 3105,1081 3205,1081 3305,1081 3405,1081 3505,1081 3605,1081 3705,1081 3805,1081 3905,1081 4005,1081 4105,1081 4205,1081 4305,1081 4405,1081 4505,1081 4605,1081 4705,1081 4805,1081 4905,1081 5005,1081 5105,1081 5205,1081 5305,1081 5405,1081 255,1181 355,1181 455,1181 555,1181 655,1181 755,1181 855,1181 955,1181 2455,1181 2555,1181 2655,1181 2755,1181 2855,1181 2955,1181 5455,1181 6255,1181 105,1281 205,1281 305,1281 405,1281 505,1281 605,1281 705,1281 805,1281 905,1281 1005,1281 2605,1281 2705,1281 2805,1281 2905,1281 5405,1281 155,1381 255,1381 355,1381 455,1381 555,1381 655,1381 755,1381 855,1381 955,1381 1055,1381 1155,1381 1255,1381 1655,1381 2355,1381 2555,1381 2655,1381 2755,1381 2855,1381 2955,1381 5455,1381 6255,1381 105,1481 205,1481 305,1481 405,1481 505,1481 605,1481 705,1481 805,1481 905,1481 1005,1481 1105,1481 1205,1481 1505,1481 2405,1481 2605,1481 2705,1481 2805,1481 2905,1481 3005,1481 5405,1481 155,1581 255,1581 355,1581 455,1581 555,1581 655,1581 755,1581 855,1581 955,1581 1055,1581 1155,1581 1255,1581 2355,1581 2555,1581 2655,1581 2755,1581 2855,1581 2955,1581 5455,1581 6255,1581 105,1681 205,1681 305,1681 405,1681 505,1681 605,1681 705,1681 1005,1681 1105,1681 1305,1681 1405,1681 1705,1681 2005,1681 2305,1681 2405,1681 2605,1681 2705,1681 2805,1681 2905,1681 3005,1681 5405,1681 155,1781 255,1781 355,1781 455,1781 555,1781 655,1781 1055,1781 2155,1781 2355,1781 2555,1781 2655,1781 2755,1781 2855,1781 2955,1781 5455,1781 6255,1781 105,1881 205,1881 305,1881 405,1881 505,1881 605,1881 1205,1881 2405,1881 2605,1881 2705,1881 2805,1881 2905,1881 3005,1881 3905,1881 5005,1881 5405,1881 5505,1881 6005,1881 6105,1881 6205,1881 155,1981 255,1981 355,1981 2155,1981 2555,1981 2655,1981 2755,1981 2855,1981 2955,1981 5155,1981 5455,1981 5555,1981 5655,1981 5755,1981 6055,1981 6155,1981 6255,1981 105,2081 205,2081 305,2081 505,2081 2305,2081 2405,2081 2505,2081 2605,2081 2705,2081 6005,2081 6105,2081 6205,2081 2255,2181 2355,2181 2455,2181 2555,2181 2655,2181 2855,2181 5555,2181 5655,2181 5755,2181 5855,2181 5955,2181 6055,2181 6155,2181 6255,2181 105,2281 2305,2281 2805,2281 2905,2281 5505,2281 5605,2281 5705,2281 5805,2281 5905,2281 6005,2281 6105,2281 6205,2281 2255,2381 2355,2381 5455,2381 5555,2381 5755,2381 5855,2381 5955,2381 6055,2381 6155,2381 6255,2381 105,2481 2305,2481 3005,2481 3105,2481 3205,2481 3305,2481 3405,2481 3505,2481 3605,2481 3705,2481 3805,2481 3905,2481 4005,2481 5805,2481 5905,2481 6005,2481 6105,2481 6205,2481 2255,2581 2355,2581 2455,2581 2555,2581 2655,2581 2955,2581 3055,2581 3155,2581 3255,2581 3355,2581 3455,2581 3555,2581 3655,2581 3755,2581 3855,2581 3955,2581 4055,2581 4155,2581 4255,2581 4355,2581 4455,2581 4555,2581 4655,2581 4755,2581 4855,2581 5955,2581 6055,2581 6155,2581 6255,2581 105,2681 605,2681 705,2681 805,2681 905,2681 1005,2681 1105,2681 1205,2681 1305,2681 1405,2681 1505,2681 1605,2681 1705,2681 1805,2681 1905,2681 2005,2681 2105,2681 2205,2681 2305,2681 2405,2681 2505,2681 2605,2681 3405,2681 3505,2681 4305,2681 4505,2681 4905,2681 5005,2681 5205,2681 5305,2681 5505,2681 5605,2681 5705,2681 6005,2681 6105,2681 6205,2681 655,2781 755,2781 855,2781 955,2781 1055,2781 1155,2781 1255,2781 1355,2781 1455,2781 1555,2781 1655,2781 1755,2781 1855,2781 1955,2781 2055,2781 2155,2781 2255,2781 2355,2781 2455,2781 2555,2781 2655,2781 2755,2781 3955,2781 4155,2781 4355,2781 4755,2781 4855,2781 4955,2781 5255,2781 5355,2781 5555,2781 6055,2781 6155,2781 6255,2781 105,2881 605,2881 705,2881 805,2881 905,2881 1005,2881 1105,2881 1205,2881 1305,2881 1405,2881 1505,2881 1605,2881 1705,2881 1805,2881 1905,2881 2005,2881 2105,2881 2205,2881 2305,2881 2405,2881 2505,2881 2605,2881 2705,2881 3205,2881 3305,2881 3805,2881 5005,2881 5105,2881 5205,2881 5305,2881 5405,2881 5805,2881 6005,2881 6105,2881 6205,2881 2655,2981 2755,2981 3355,2981 3455,2981 3655,2981 3755,2981 3855,2981 5055,2981 5155,2981 5255,2981 5355,2981 5455,2981 5555,2981 5755,2981 5955,2981 6055,2981 6155,2981 6255,2981 105,3081 205,3081 305,3081 505,3081 605,3081 1905,3081 3905,3081 4005,3081 4305,3081 4405,3081 4605,3081 4705,3081 4805,3081 4905,3081 5005,3081 5105,3081 5205,3081 5305,3081 5405,3081 5505,3081 5605,3081 5705,3081 5805,3081 5905,3081 6005,3081 155,3181 255,3181 355,3181 555,3181 2755,3181 3155,3181 3355,3181 3555,3181 3755,3181 3855,3181 4155,3181 105,3281 205,3281 305,3281 5105,3281 5405,3281 5505,3281 5605,3281 5705,3281 5805,3281 5905,3281 6005,3281 6105,3281 6205,3281 155,3381 255,3381 355,3381 455,3381 2655,3381 3155,3381 3955,3381 4155,3381 4255,3381 4355,3381 4455,3381 4655,3381 4755,3381 4855,3381 4955,3381 5055,3381 5155,3381 5355,3381 5455,3381 5555,3381 5655,3381 5755,3381 5855,3381 5955,3381 6055,3381 105,3481 205,3481 305,3481 405,3481 505,3481 805,3481 2705,3481 2805,3481 2905,3481 3005,3481 3105,3481 3205,3481 3305,3481 3405,3481 3505,3481 3605,3481 3705,3481 3805,3481 3905,3481 4205,3481 4305,3481 4805,3481 4905,3481 5005,3481 5505,3481 5605,3481 5705,3481 5805,3481 5905,3481 6005,3481 6105,3481 6205,3481 155,3581 255,3581 355,3581 455,3581 555,3581 955,3581 2755,3581 2855,3581 2955,3581 3055,3581 3155,3581 3255,3581 3355,3581 3455,3581 3555,3581 3655,3581 3755,3581 3855,3581 3955,3581 4055,3581 4155,3581 4255,3581 4355,3581 4755,3581 4855,3581 4955,3581 5055,3581 5155,3581 5455,3581 5555,3581 5655,3581 5755,3581 5855,3581 5955,3581 6055,3581 6155,3581 6255,3581 305,3681 405,3681 505,3681 2705,3681 2805,3681 2905,3681 3005,3681 3105,3681 3205,3681 3305,3681 3405,3681 3505,3681 3605,3681 3705,3681 3805,3681 3905,3681 4005,3681 4105,3681 4205,3681 4305,3681 4505,3681 4805,3681 4905,3681 5005,3681 5505,3681 5605,3681 5705,3681 5805,3681 5905,3681 6005,3681 155,3781 255,3781 355,3781 455,3781 555,3781 655,3781 755,3781 855,3781 955,3781 1055,3781 1155,3781 1255,3781 1355,3781 1455,3781 1555,3781 1655,3781 1755,3781 1855,3781 1955,3781 2055,3781 2155,3781 2255,3781 2355,3781 2455,3781 2555,3781 2655,3781 2755,3781 2855,3781 2955,3781 3055,3781 3155,3781 3255,3781 3355,3781 3455,3781 3555,3781 3655,3781 3755,3781 3855,3781 3955,3781 4055,3781 4155,3781 4255,3781 4355,3781 4455,3781 4555,3781 4655,3781 4755,3781 4855,3781 4955,3781 5055,3781 5155,3781 5255,3781 5355,3781 5455,3781 5555,3781 5655,3781 5755,3781 5855,3781 5955,3781 6055,3781 6155,3781 6255,3781 155,3981 255,3981 355,3981 455,3981 555,3981 655,3981 755,3981 855,3981 955,3981 1055,3981 1155,3981 1255,3981 1355,3981 1455,3981 1555,3981 1655,3981 1755,3981 1855,3981 1955,3981 2055,3981 2155,3981 2255,3981 2355,3981 2455,3981 2555,3981 2655,3981 2755,3981 2855,3981 2955,3981 3055,3981 3155,3981 3255,3981 3355,3981 3455,3981 3555,3981 3655,3981 3755,3981 3855,3981 3955,3981 4055,3981 4155,3981 4255,3981 4355,3981 4455,3981 4555,3981 4655,3981 4755,3981 4855,3981 4955,3981 5055,3981 5155,3981 5255,3981 5355,3981 5455,3981 5555,3981 5655,3981 5755,3981 5855,3981 5955,3981 6055,3981 6155,3981 6255,3981
  other v3: 4062.34,2754.7 4054.21,3350.91
B-IP: J2.SIG U1.2 | length 686.5
  Top Layer w13.3: J2.SIG@43.5,991 U1.2@730.02,991
B-OP: J3.SIG U5.2 | length 888.2
  Top Layer w13.3: U5.2@5367.3,3212 J3.SIG@6255.53,3212
CoCap_U_VectorModulator1: C4_U_VectorModulator1.2 L1_U_VectorModulator1.2 U4_U_VectorModulator1.13 U4_U_VectorModulator1.14 | length 151.9
  Top Layer w10: U4_U_VectorModulator1.14@4066.39,2810.96 U4_U_VectorModulator1.13@4086.07,2810.96 4086.07,2888.07 cw(c4104.03,2888.07) C4_U_VectorModulator1.2@4091.33,2900.76 L1_U_VectorModulator1.2@4091.33,2941.76
CoCap_U_VectorModulator2: C4_U_VectorModulator2.2 L1_U_VectorModulator2.2 U4_U_VectorModulator2.13 U4_U_VectorModulator2.14 | length 152.9
  Top Layer w10: U4_U_VectorModulator2.14@4064.06,3408.2 U4_U_VectorModulator2.13@4083.74,3408.2 4083.74,3493.16 4088.58,3498 C4_U_VectorModulator2.2@4089,3498 L1_U_VectorModulator2.2@4089,3539
HMCIN_U_VectorModulator1: U4_U_VectorModulator1.3 U6_U_VectorModulator1.3 | length 87.6
  Top Layer w10: U6_U_VectorModulator1.3@3917.37,2733.79 cw(c3927.42,2733.79) 3927.42,2743.83 U4_U_VectorModulator1.3@3999.26,2743.83
HMCIN_U_VectorModulator2: U4_U_VectorModulator2.3 U6_U_VectorModulator2.3 | length 75.2
  Top Layer w10: U6_U_VectorModulator2.3@3924.3,3331.51 cw(c3947.38,3308.43) 3947.38,3341.07 U4_U_VectorModulator2.3@3996.93,3341.07
HMCINbar_U_VectorModulator1: U4_U_VectorModulator1.2 U6_U_VectorModulator1.4 | length 87.2
  Top Layer w10: U6_U_VectorModulator1.4@3917.37,2772.76 ccw(c3926.62,2772.76) 3926.62,2763.52 U4_U_VectorModulator1.2@3999.26,2763.52
HMCINbar_U_VectorModulator2: U4_U_VectorModulator2.2 U6_U_VectorModulator2.4 | length 75.2
  Top Layer w10: U6_U_VectorModulator2.4@3924.3,3370.49 ccw(c3947.8,3393.98) 3947.8,3360.76 U4_U_VectorModulator2.2@3996.93,3360.76
I1: P1.3 U4_U_VectorModulator2.5 | length 2502.5
  Top Layer w10: v2(3992.31,3206) 3992.31,3261.26 cw(c4024.69,3261.26) U4_U_VectorModulator2.5@4024.69,3293.63
  Bottom Layer w10: v2(3992.31,3206) 3992.31,3195.88 4179.2,3009 5807,3009 5920,2896 5920,2778.27 5790.12,2648.39 5770.39,2648.39 P1.3@5761,2639
I2: P1.4 U4_U_VectorModulator1.5 | length 1968.2
  Top Layer w10: v2(3988,2596) 3988,2647.94 4025.78,2685.72 4026.91,2685.72 4027.02,2685.83 U4_U_VectorModulator1.5@4027.02,2696.39
  Bottom Layer w10: v2(3988,2596) 4110.66,2473.34 5695.34,2473.34 P1.4@5761,2539
NetC1_U_VectorModulator1_1: C1_U_VectorModulator1.1 U4_U_VectorModulator1.9 | length 65.7
  Top Layer w13.3: U4_U_VectorModulator1.9@4113.83,2724.15 4113.88,2724.1 4178.25,2724.1 C1_U_VectorModulator1.1@4179.14,2723.2
NetC1_U_VectorModulator2_1: C1_U_VectorModulator2.1 U4_U_VectorModulator2.9 | length 61.2
  Top Layer w13.3: U4_U_VectorModulator2.9@4111.5,3321.39 C1_U_VectorModulator2.1@4172.7,3321.39
NetC2_U_VectorModulator1_2: C2_U_VectorModulator1.2 U6_U_VectorModulator1.2 | length 49.1
  Top Layer w10: U6_U_VectorModulator1.2@3891.42,2733.75 3891.62,2733.46 cw(c3878.79,2724.57) 3894.4,2724.57 3894.4,2689.81 cw(c3884.4,2689.81) C2_U_VectorModulator1.2@3893.4,2685.45
NetC2_U_VectorModulator2_2: C2_U_VectorModulator2.2 U6_U_VectorModulator2.2 | length 49.2
  Top Layer w10: C2_U_VectorModulator2.2@3894.33,3283.35 ccw(c3884.71,3292.97) 3898.31,3292.97 U6_U_VectorModulator2.2@3898.31,3331.51
NetJ5_SIG: J5.SIG J6.SIG | length 6212.2
  Top Layer w13.3: J5.SIG@43.5,3866.99 J6.SIG@6255.71,3866.99
NetJ7_C: J7.C R6.2 R11.1 | length 585.7
  Top Layer w0: J7.C@2959,3022 J7.C@2959.33,3022.33
  Top Layer w13.3: J7.C@2959.33,3022.33 3199.48,3022.33 ccw(c3198.49,3083.03) 3259.19,3083.43 3259.19,3083.52 ccw(c-5625.95,3011.36) 3258.82,3119.68 ccw(c-38712.17,2607.91) 3256.39,3290.46 3256.83,3290.14 3257,3290.31 R11.1@3299.48,3290.31
NetJ8_C: J8.C R8.2 R12.1 | length 267.7
  Top Layer w13.3: J8.C@3556,3004 3554.74,3002.74 3554.74,2779.6 3553.49,2778.35 3556.98,2774.86 3592.83,2774.86 R12.1@3593,2774.68
Q1: P1.1 U4_U_VectorModulator2.6 | length 2457.9
  Top Layer w10: v2(4044.37,3194.76) U4_U_VectorModulator2.6@4044.37,3293.63
  Bottom Layer w10: v2(4044.37,3194.76) 4044.37,3194.63 4184,3055 5834,3055 5962,2927 5962,2739 5886.53,2663.53 5885.53,2663.53 P1.1@5861,2639
Q2: P1.2 U4_U_VectorModulator1.6 | length 1906.2
  Top Layer w10: v2(4046.7,2665.36) U4_U_VectorModulator1.6@4046.7,2696.39
  Bottom Layer w10: v2(4046.7,2665.36) 4047.79,2665.36 4060.42,2652.73 4654.97,2652.73 4665.23,2663 4861,2663 4934,2590 5810,2590 P1.2@5861,2539
RF-C1: R4.2 U3.2 U5.6 | length 188
  Top Layer w13.3: U3.2@5143.49,3188 5143.59,3187.9 5256.79,3187.9 R4.2@5261.22,3183.47 5263.67,3185.92 5328.41,3185.92 U5.6@5328.51,3186.02
RF-C1-1: C1_U_VectorModulator2.2 R13.1 R14.1 | length 362.9
  Top Layer w0: C1_U_VectorModulator2.2@4213.6,3321.56 4212.86,3320.81 C1_U_VectorModulator2.2@4214.82,3320.81 ; R13.1@4520.17,3265.12 R13.1@4523.03,3267.98
  Top Layer w13.3: C1_U_VectorModulator2.2@4212.86,3320.81 4212.86,3281.81 ccw(c4229.54,3281.81) 4229.54,3265.12 R13.1@4520.17,3265.12
RF-C1-2: C1_U_VectorModulator1.2 R15.1 R16.1 | length 720.8
  Top Layer w13.3: C1_U_VectorModulator1.2@4218.51,2723.2 4218,2723.72 4218,3105 cw(c4266.68,3105) 4266.68,3153.68 R16.1@4529,3153.68
RF-C2-1: R3.1 R13.2 U3.4 | length 577.6
  Top Layer w13.3: R13.2@4567.83,3268.36 4568.02,3268.17 5004.16,3268.17 cw(c5004.16,3241.19) 5031.14,3241.19 5031.14,3217.71 5033.91,3214.94 5104.5,3214.94 5104.65,3214.78 U3.4@5104.65,3214.17
RF-C2-2: R3.2 R15.2 U3.6 | length 539.9
  Top Layer w13.3: R15.2@4568.68,3154 4569.92,3155.24 5031.76,3155.24 R3.2@5033,3156.47 5037.12,3160.6 5104.36,3160.6 5104.51,3160.75 U3.6@5104.51,3162.02
RF-J9: J9.C R14.2 | length 250.1
  Top Layer w13.3: R14.2@4528.05,3308.68 4535.05,3315.68 J9.C@4535.05,3555.84
RF-J10: J10.C R16.2 | length 336
  Top Layer w13.3: R16.2@4529,3114.31 4533.5,3109.81 4533.5,2786.5 J10.C@4538,2782
RF-S1: R1.2 U1.6 U2.2 | length 183.9
  Top Layer w13.3: U1.6@769,1014.98 769.1,1015.08 848.07,1015.08 R1.2@852.51,1019.53 948.89,1019.53 949.42,1019 U2.2@950.8,1019
RF-S2-1: R2.1 R5.1 R6.1 U2.6 | length 56666.8
  Top Layer w13.3: U2.6@989.88,1045.08 R2.1@1080.55,1045.08 ; R2.1@1082,1046.53 1082.07,1046.6 1082.07,1184.35 cw(c1150,1163.59) 1150,1234.62 1280.15,1234.66 1286.81,1234.66 ccw(c1286.81,1271.32) 1323.46,1271.32 1323.46,1561.91 cw(c1360.11,1561.91) 1396.76,1561.91 1396.76,1094.42 ccw(c1433.42,1094.42) 1470.07,1094.42 1470.07,1561.95 cw(c1506.72,1561.95) 1543.37,1561.95 1543.37,1094.46 ccw(c1580.03,1094.46) 1616.68,1094.46 1616.68,1561.99 cw(c1653.33,1561.99) 1689.98,1561.99 1689.98,1094.5 ccw(c1726.64,1094.5) 1763.29,1094.5 1763.29,1562.04 cw(c1799.94,1562.04) 1836.59,1562.04 1836.59,1094.55 ccw(c1873.25,1094.55) 1909.9,1094.55 1909.9,1562.08 cw(c1946.55,1562.08) 1983.2,1562.08 1983.2,1094.59 ccw(c2019.86,1094.59) 2056.51,1094.59 2056.51,1562.12 cw(c2093.16,1562.12) 2129.81,1562.12 2129.81,1094.63 ccw(c2166.47,1094.63) 2203.12,1094.63 2203.12,1562.17 cw(c2239.77,1562.17) 2276.42,1562.17 2276.42,1271.62 ccw(c2313.08,1271.62) 2313.09,1234.97 2400.35,1234.99 2407,1235 2422,1235 ccw(c2419.35,1281.29) 2465.72,1281.29 2465.72,1936.59 ccw(c2401.3,1936.59) 2400,2001 2310.31,2001 2303.66,2001 ccw(c2303.66,1964.35) 2267.01,1964.35 2267.01,1764.69 cw(c2230.35,1764.69) 2193.7,1764.69 2193.7,2557.46 ccw(c2157.05,2557.46) 2120.4,2557.46 2120.4,1764.69 cw(c2083.74,1764.69) 2047.09,1764.69 2047.09,2557.46 ccw(c2010.44,2557.46) 1973.79,2557.46 1973.79,1764.69 cw(c1937.13,1764.69) 1900.48,1764.69 1900.48,2557.46 ccw(c1863.83,2557.46) 1827.18,2557.46 1827.18,1764.69 cw(c1790.52,1764.69) 1753.87,1764.69 1753.87,2557.46 ccw(c1717.22,2557.46) 1680.57,2557.46 1680.57,1764.69 cw(c1643.91,1764.69) 1607.26,1764.69 1607.26,2557.46 ccw(c1570.61,2557.46) 1533.96,2557.46 1533.96,1764.69 cw(c1497.3,1764.69) 1460.65,1764.69 1460.65,2557.46 ccw(c1424,2557.46) 1387.35,2557.46 1387.35,1764.69 cw(c1350.69,1764.69) 1314.04,1764.69 1314.04,2557.46 ccw(c1277.39,2557.46) 1240.74,2557.46 1240.74,1764.69 cw(c1204.08,1764.69) 1167.43,1764.69 1167.43,2557.46 ccw(c1130.78,2557.46) 1094.13,2557.46 1094.13,1764.69 cw(c1057.47,1764.69) 1020.82,1764.69 1020.82,2557.46 ccw(c984.17,2557.46) 947.52,2557.46 947.52,1764.69 cw(c910.86,1764.69) 874.21,1764.69 874.21,2557.46 ccw(c837.56,2557.46) 800.91,2557.46 800.91,1764.69 cw(c764.25,1764.69) 727.6,1764.69 727.6,2557.46 ccw(c690.95,2557.46) 654.3,2557.46 654.3,2037.65 cw(c617.64,2037.65) 617.64,2001 573.07,2001 566.42,2001 476,2001 cw(c476,2065.1) 411.9,2065.1 411.9,2097 411.9,2103.65 ccw(c375.25,2103.65) 375.25,2140.31 206.97,2140.31 cw(c206.97,2176.96) 206.97,2213.61 494.33,2213.61 ccw(c494.33,2250.26) 494.33,2286.92 206.97,2286.92 cw(c206.97,2323.57) 206.97,2360.22 494.33,2360.22 ccw(c494.33,2396.87) 494.33,2433.53 206.97,2433.53 cw(c206.97,2470.18) 206.97,2506.83 494.33,2506.83 ccw(c494.33,2543.48) 494.33,2580.14 206.97,2580.14 cw(c206.97,2616.79) 206.97,2653.44 494.33,2653.44 ccw(c494.33,2690.09) 494.33,2726.75 206.97,2726.75 cw(c206.97,2763.4) 206.97,2800.05 494.33,2800.05 ccw(c494.33,2836.7) 494.33,2873.36 206.97,2873.36 cw(c206.97,2910.01) 206.97,2946.66 494.33,2946.66 ccw(c494.33,2983.31) 494.33,3019.97 448.56,3019.97 cw(c448.56,3056.62) 411.9,3056.62 412,3056.71 412,3151 412,3247 cw(c488.62,3247) 488.62,3323.62 579.24,3323.62 585.89,3323.62 ccw(c585.89,3360.27) 622.54,3360.27 622.54,3647.64 cw(c659.19,3647.64) 695.85,3647.64 695.85,2997.72 ccw(c732.5,2997.72) 769.15,2997.72 769.15,3647.64 cw(c805.8,3647.64) 842.46,3647.64 842.46,2997.72 ccw(c879.11,2997.72) 915.76,2997.72 915.76,3647.64 cw(c952.41,3647.64) 989.07,3647.64 989.07,2997.72 ccw(c1025.72,2997.72) 1062.37,2997.72 1062.37,3647.64 cw(c1099.02,3647.64) 1135.68,3647.64 1135.68,2997.72 ccw(c1172.33,2997.72) 1208.98,2997.72 1208.98,3647.64 cw(c1245.63,3647.64) 1282.29,3647.64 1282.29,2997.72 ccw(c1318.94,2997.72) 1355.59,2997.72 1355.59,3647.64 cw(c1392.24,3647.64) 1428.9,3647.64 1428.9,2997.72 ccw(c1465.55,2997.72) 1502.2,2997.72 1502.2,3647.64 cw(c1538.85,3647.64) 1575.51,3647.64 1575.51,2997.72 ccw(c1612.16,2997.72) 1648.81,2997.72 1648.81,3647.64 cw(c1685.46,3647.64) 1722.12,3647.64 1722.12,2997.72 ccw(c1758.77,2997.72) 1795.42,2997.72 1795.42,3647.64 cw(c1832.07,3647.64) 1868.73,3647.64 1868.73,2997.72 ccw(c1905.38,2997.72) 1942.03,2997.72 1942.03,3647.64 cw(c1978.68,3647.64) 2015.34,3647.64 2015.34,2997.72 ccw(c2051.99,2997.72) 2088.64,2997.72 2088.64,3647.64 cw(c2125.29,3647.64) 2161.95,3647.64 2161.95,2997.72 ccw(c2198.6,2997.72) 2235.25,2997.72 2235.25,3647.64 cw(c2271.9,3647.64) 2308.56,3647.64 2308.56,2997.72 ccw(c2345.21,2997.72) 2381.86,2997.72 2381.86,3647.64 cw(c2418.51,3647.64) 2455.17,3647.64 2455.17,2997.72 ccw(c2491.82,2997.72) 2528.47,2997.72 2528.47,3647.64 cw(c2565.12,3647.64) 2601.78,3647.64 2601.78,3105.12 ccw(c2638.43,3105.12) 2675.08,3105.12 2675.08,3286.97 cw(c2711.73,3286.97) 2711.73,3323.62 2761.99,3323.62 3243.2,3323.62 3244.27,3324.68 3251,3324.68 R5.1@3257.14,3330.83